# EAGLE board PCB Schematic (EAGLE 9.7.0)
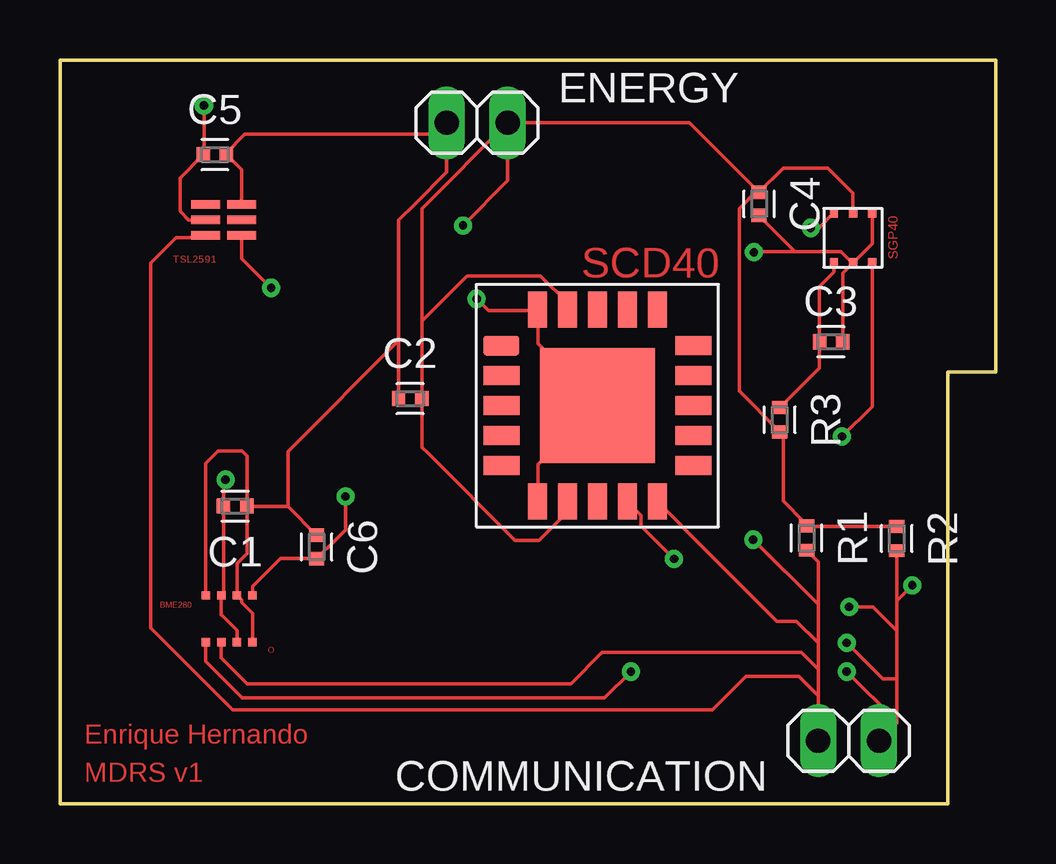
[diagram p0: board, top side]
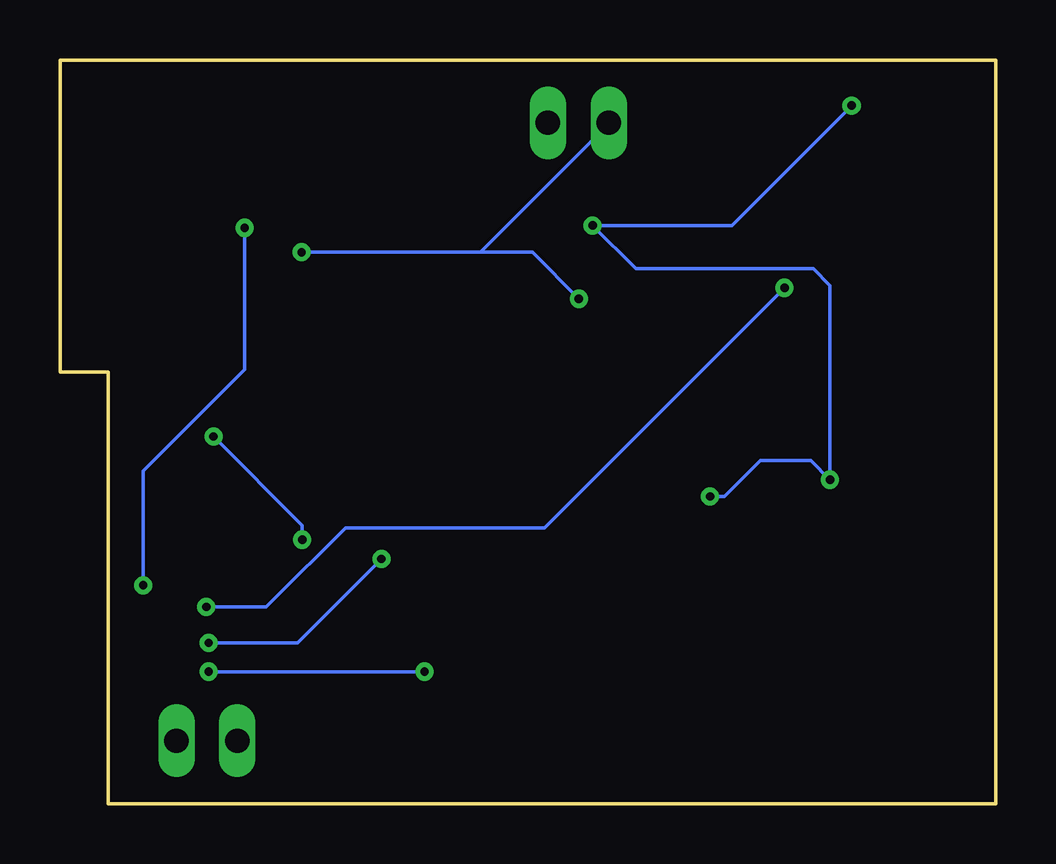
[diagram p1: board, bottom side, seen from below]

Size 39 x 31 mm. Coordinates in mm from the lower left corner, seen from the top.
Outline: 39,26 39,18 37,18 37,5 37,0 0,0 0,5 0,26 0,31 39,31 39,26
Copper layers (1*16): Top / Bottom
Stack-up Default Layer Stack: Top User Defined 0.035mm / Dielectric-1 User Defined 1.5mm / Bottom User Defined 0.035mm
Design rules: minimum copper width 6mil, minimum drill size 0.35mm, copper clearance wire_polygon to wire_polygon 6mil, copper clearance wire_polygon to pad_smd 6mil, copper clearance wire_polygon to via 6mil, copper clearance pad_smd to pad_smd 6mil, copper clearance pad_smd to via 6mil, copper clearance via to via 6mil, copper clearance smd to pad (same net) 6mil, copper clearance smd to via (same net) 6mil, copper clearance smd to smd (same net) 6mil, dimension clearance 40mil, restrict clearance 0mil, via restrict clearance 0mil, drill distance 6mil, keepout clearance 0mil

## Footprints (pad centres in the part's own frame; a part is rotated, then mirrored left to right if it is on the bottom)
BME280 = smd 0.35 x 0.35: P$1GND 0,-1.95; P$2CSB -0.65,-1.95; P$3SDI -1.3,-1.95; P$4SCK -1.95,-1.95; P$5SDO -1.95,0; P$6VDDIO -1.3,0; P$7GND -0.65,0; P$8VDD 0,0
CAPC1005X60 = smd 0.56 x 0.629: 1 -0.485,0; 2 0.485,0
1X02 = drill 1.016 long: 1 -1.27,0; 2 1.27,0
RESC1005X40 = smd 0.535 x 0.644: 1 -0.507,0; 2 0.507,0
SCD40 = smd 1.5 x 0.8: P$1DNC -4,2.5; P$2DNC -4,1.25; P$3DNC -4,0; P$4DNC -4,-1.25; P$5DNC -4,-2.5; P$11DNC 4,-2.5; P$12DNC 4,-1.25; P$13DNC 4,0; P$14DNC 4,1.25; P$15DNC 4,2.5 | smd 0.8 x 1.5: P$6GND -2.5,-4; P$7VDD -1.25,-4; P$8DNC 0,-4; P$9SCL 1.25,-4; P$10SDA 2.5,-4; P$16DNC 2.5,4; P$17DNC 1.25,4; P$18DNC 0,4; P$19VDDH -1.25,4; P$20GND -2.5,4 | smd 4.8 x 4.8: P$21GND 0,0
SGP40 = smd 0.4 x 0.35: P$1VDD 0.175,2.02; P$2VSS 0.175,1.22; P$3SDA 0.175,0.42; P$4N/A 2.265,0.42; P$5VDDH 2.265,1.22; P$6SCL 2.265,2.02
TSL2591 = smd 1.2 x 0.35: P$1SCL -0.75,0.65; P$2INT -0.75,0; P$3GND -0.75,-0.65; P$4NC 0.75,-0.65; P$5VDD 0.75,0; P$6SDA 0.75,0.65

## Placement (x,y rotation side)
BME280  BME280  [BME280]  8.03,8.68 0 top
C1  100nF  [CAPC1005X60]  7.3,12.4 180 top
C2  100nF  [CAPC1005X60]  14.6,16.88 0 top
C3  1uF  [CAPC1005X60]  32.14,19.25 0 top
C4  1uF  [CAPC1005X60]  29.14,25 270 top
C5  1uF  [CAPC1005X60]  6.46,27.05 0 top
C6  100nF  [CAPC1005X60]  10.7,10.7 270 top
COMMUNICATION  PINHD-1X02_1X02M  [1X02]  32.88,2.62 180 top
ENERGY  PINHD-1X02_1X02M  [1X02]  17.39,28.38 0 top
R1  4.7k  [RESC1005X40]  31.12,11.07 270 top
R2  4.7k  [RESC1005X40]  34.88,11.05 270 top
R3  4.7  [RESC1005X40]  30,16 270 top
SCD40  SCD40  [SCD40]  22.4,16.59 0 top
SGP40  SGP40  [SGP40]  34.28,22.36 90 top
TSL2591  [TSL2591]  6.83,24.33 180 top

## Library data of the parts
BME280 SCD40 SGP40 TSL2591 = SENSORES
C1-C6 = Tinkercad; CATEGORY: Capacitor
COMMUNICATION ENERGY = Tinkercad
R1-R3 = Resistor; CATEGORY: Resistors; DESCRIPTION: Chip Resistor 1.05 X 0.54 X 0.40 mm body 0402(1005-METRIC) Package; PACKAGE_SIZE: 0402; PACKAGE_TYPE: SMD

## Nets
+3.3V: BME280.P$2CSB BME280.P$6VDDIO BME280.P$8VDD C1.2 C2.2 C4.1 C5.1 C6.2 ENERGY.2 R1.1 R2.1 R3.2 SCD40.P$7VDD SCD40.P$19VDDH SGP40.P$5VDDH TSL2591.P$5VDD
GND: BME280.P$1GND BME280.P$5SDO BME280.P$7GND C1.1 C2.1 C3.2 C4.2 C5.2 C6.1 ENERGY.1 SCD40.P$6GND SCD40.P$20GND SCD40.P$21GND SGP40.P$2VSS SGP40.P$4N/A TSL2591.P$3GND
N$3: C3.1 R3.1 SGP40.P$1VDD
SCL: BME280.P$4SCK COMMUNICATION.1 R2.2 SCD40.P$9SCL SGP40.P$6SCL TSL2591.P$1SCL
SDA: BME280.P$3SDI COMMUNICATION.2 R1.2 SCD40.P$10SDA SGP40.P$3SDA TSL2591.P$6SDA

## Tracks (layer width: path | path; a pad name or v marks a point on that pad's centre or on a via)
+3.3V  (via drill 0.35)
  Top 0.152: 15.36,14.59 18.98,10.97 19.98,10.97 21.15,12.15 SCD40.P$7VDD 21,12.44 | 15.36,14.59 15.1,14.85 15.1,16.9 C2.2 15.09,17 | 21,20.74 SCD40.P$19VDDH 21.15,20.88 20.03,22 20,22 16.97,22 15.09,20.12 15.09,17 | 15.09,17 15.09,24.81 ENERGY.2 | ENERGY.2 26.24,28.38 C4.1 | C4.1 30.16,26.5 32,26.5 33.06,25.44 SGP40.P$5VDDH | C6.2 9.2,10.21 8.03,9.04 BME280.P$8VDD | BME280.P$2CSB 7.38,7.22 6.8,7.8 6.73,7.87 BME280.P$6VDDIO 6.82,8.77 6.82,10.3 C1.2 6.82,13.42 v6.9,13.5 | TSL2591.P$5VDD 5.37,24.33 5,24.7 5,26.07 C5.1 6,27.07 v6,29.1 | ENERGY.2 18.66,25.96 v16.8,24.1 | R2.1 31.21,11.55 R1.1 31.06,11.71 30.15,12.62 30.15,15.36 R3.2 29.99,15.52 28.32,17.19 28.32,24.81 29.08,25.57 C4.1 | 15.36,14.59 15.36,14.6 15.36,14.59 | 10.79,10.33 C6.2 | C6.2 11.11,10.63 11.13,10.63 11.9,11.4 v11.9,12.8
  Bottom 0.152: v6,29.1 11,24.1 v16.8,24.1 15,22.3 7.6,22.3 6.9,21.6 v6.9,13.5 7.7,14.3 9.8,14.3 11.3,12.8 v11.9,12.8
GND  (via drill 0.35)
  Top 0.152: 14.12,19.3 14.12,24.32 14.8,25 16.12,26.32 ENERGY.1 15.64,27.9 7.7,27.9 6.95,27.14 C5.2 7.58,26.42 TSL2591.P$3GND | 14.12,19.3 C2.1 13.99,16.73 | C3.2 32.63,22.11 SGP40.P$2VSS | SGP40.P$4N/A 33.86,23.34 SGP40.P$2VSS | SGP40.P$2VSS 33.03,22.54 32.55,23.01 30.9,23.01 | 30.9,23.01 30.64,23.01 | 30.64,23.01 29.08,23.01 | 29.08,23.01 29.07,23.01 | C4.2 30.64,23.01 | 30.64,23.01 30.9,23.01 | 7.8,12.39 C1.1 7.8,12.41 7.8,14.5 7.6,14.7 6.6,14.7 6.08,14.18 BME280.P$5SDO | 9.5,12.38 C6.1 10.79,11.25 | 9.5,12.38 7.8,12.38 7.8,12.39 | 7.8,12.39 7.8,10.42 7.38,10 BME280.P$7GND 7.58,8.48 7.58,8.39 8.03,7.94 BME280.P$1GND | SCD40.P$6GND 19.94,12.62 19.94,14.14 22.37,16.58 SCD40.P$21GND 22.37,16.73 19.94,19.17 19.94,20.55 SCD40.P$20GND 19.78,20.55 17.86,20.55 v17.37,21.04 | v28.93,22.98 29.08,22.98 29.08,23.01 | 9.5,12.38 9.5,14.69 14.12,19.3
  Bottom 0.152: 21.61,22.98 21.46,22.98 16.12,28.32 ENERGY.1 | 21.61,22.98 19.31,22.98 v17.37,21.04 | 21.61,22.98 v28.93,22.98
N$3
  Top 0.152: SGP40.P$1VDD 32.26,22.16 31.7,21.6 31.66,21.56 C3.1 31.66,18.17 R3.1
SCL  (via drill 0.35)
  Top 0.152: SCD40.P$9SCL 24.22,12.02 24.22,11.73 24.22,11.58 v25.6,10.2 | BME280.P$4SCK 6.08,5.92 7.6,4.4 10.1,4.4 21.35,4.4 22.7,4.4 v23.8,5.5 | 7.59,23.59 TSL2591.P$1SCL 7.58,22.73 v8.8,21.5 | R2.2 34.88,8.2 | 34.88,8.2 34.88,7.2 | 34.88,7.2 34.88,5.2 | 34.88,5.2 34.88,3.35 | 34.88,3.35 COMMUNICATION.1 | v32.8,5.5 34.88,3.42 34.88,3.35 | 34.88,5.2 34.3,5.2 v32.8,6.7 | SGP40.P$6SCL 31.63,24 v31.3,24 | v35.53,9.1 34.88,8.45 34.88,8.2 | v32.9,8.2 33.88,8.2 34.88,7.2
  Bottom 0.152: v23.8,5.5 v32.8,5.5 | v25.6,10.2 29.1,6.7 v32.8,6.7 | v31.3,24 31.3,18.1 33.8,15.6 35.53,13.87 v35.53,9.1 | v8.8,21.5 18.8,11.5 26.9,11.5 27.1,11.5 30.2,8.4 30.4,8.2 v32.9,8.2
SDA  (via drill 0.35)
  Top 0.152: SCD40.P$10SDA 26.93,10.56 29.89,7.6 30.4,7.6 30.71,7.6 31.61,6.7 | TSL2591.P$6SDA 6.07,23.59 4.85,23.59 3.78,22.53 3.78,8.2 3.78,7.32 7.2,3.9 27.2,3.9 28.6,5.3 30.81,5.3 31.61,4.5 | 6.83,6.83 BME280.P$3SDI 6.73,6.07 7.7,5.1 7.8,5 10.1,5 20.9,5 21.3,5 22.6,6.3 26.8,6.3 30.91,6.3 31.61,5.6 | R1.2 31.61,10.08 31.61,8.1 | 31.61,8.1 31.61,6.7 | 31.61,6.7 31.61,5.6 | 31.61,5.6 31.61,4.5 | 31.61,4.5 COMMUNICATION.2 | SGP40.P$3SDA 33.86,16.56 v32.6,15.3 | v28.9,11 31.61,8.29 31.61,8.1
  Bottom 0.152: v32.6,15.3 28.9,11.6 v28.9,11

## Text on the board
Top: Enrique Hernando | MDRS v1